# Altium PCB Naxida_Eyes_Up.PcbDoc
Units mil, origin at the board's own origin, x right, y up, seen from the top; angles counter-clockwise.
Board outline 2236.22 x 1401.57 mil, 2 copper layers (Top Layer, Bottom Layer); 45 components, 56 nets, 228 pads, 158 vias.
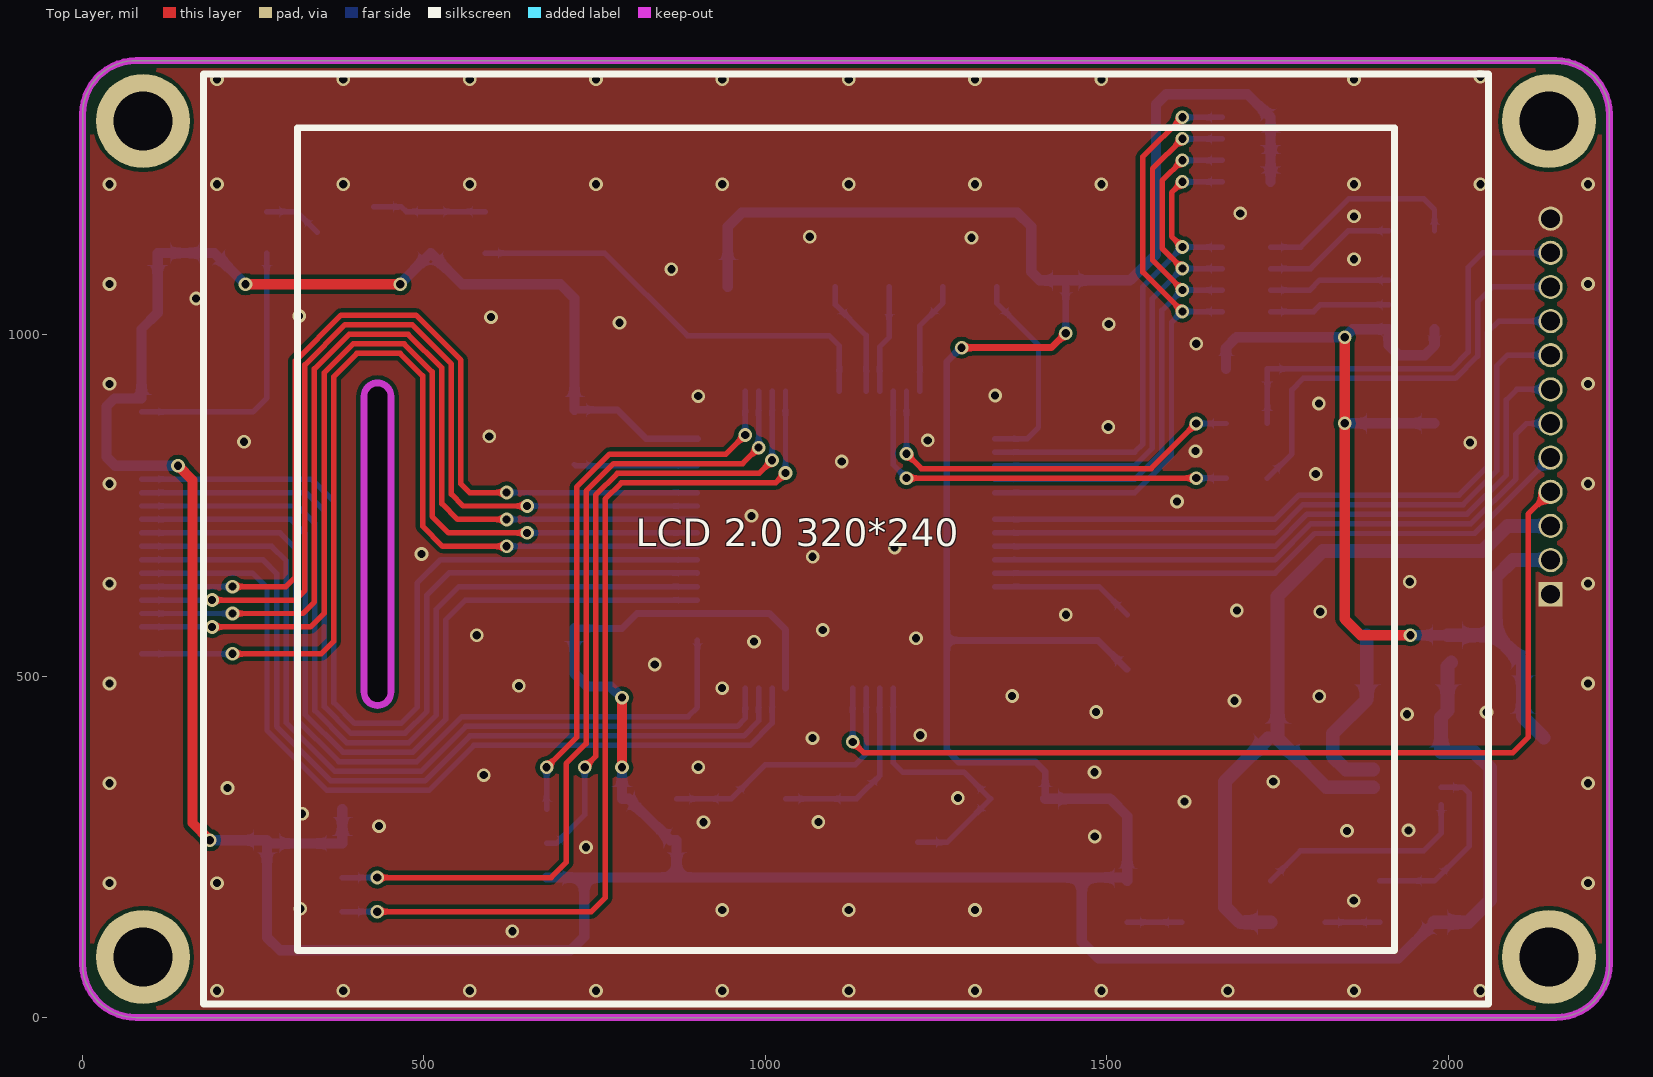
[diagram p0: Top Layer view]
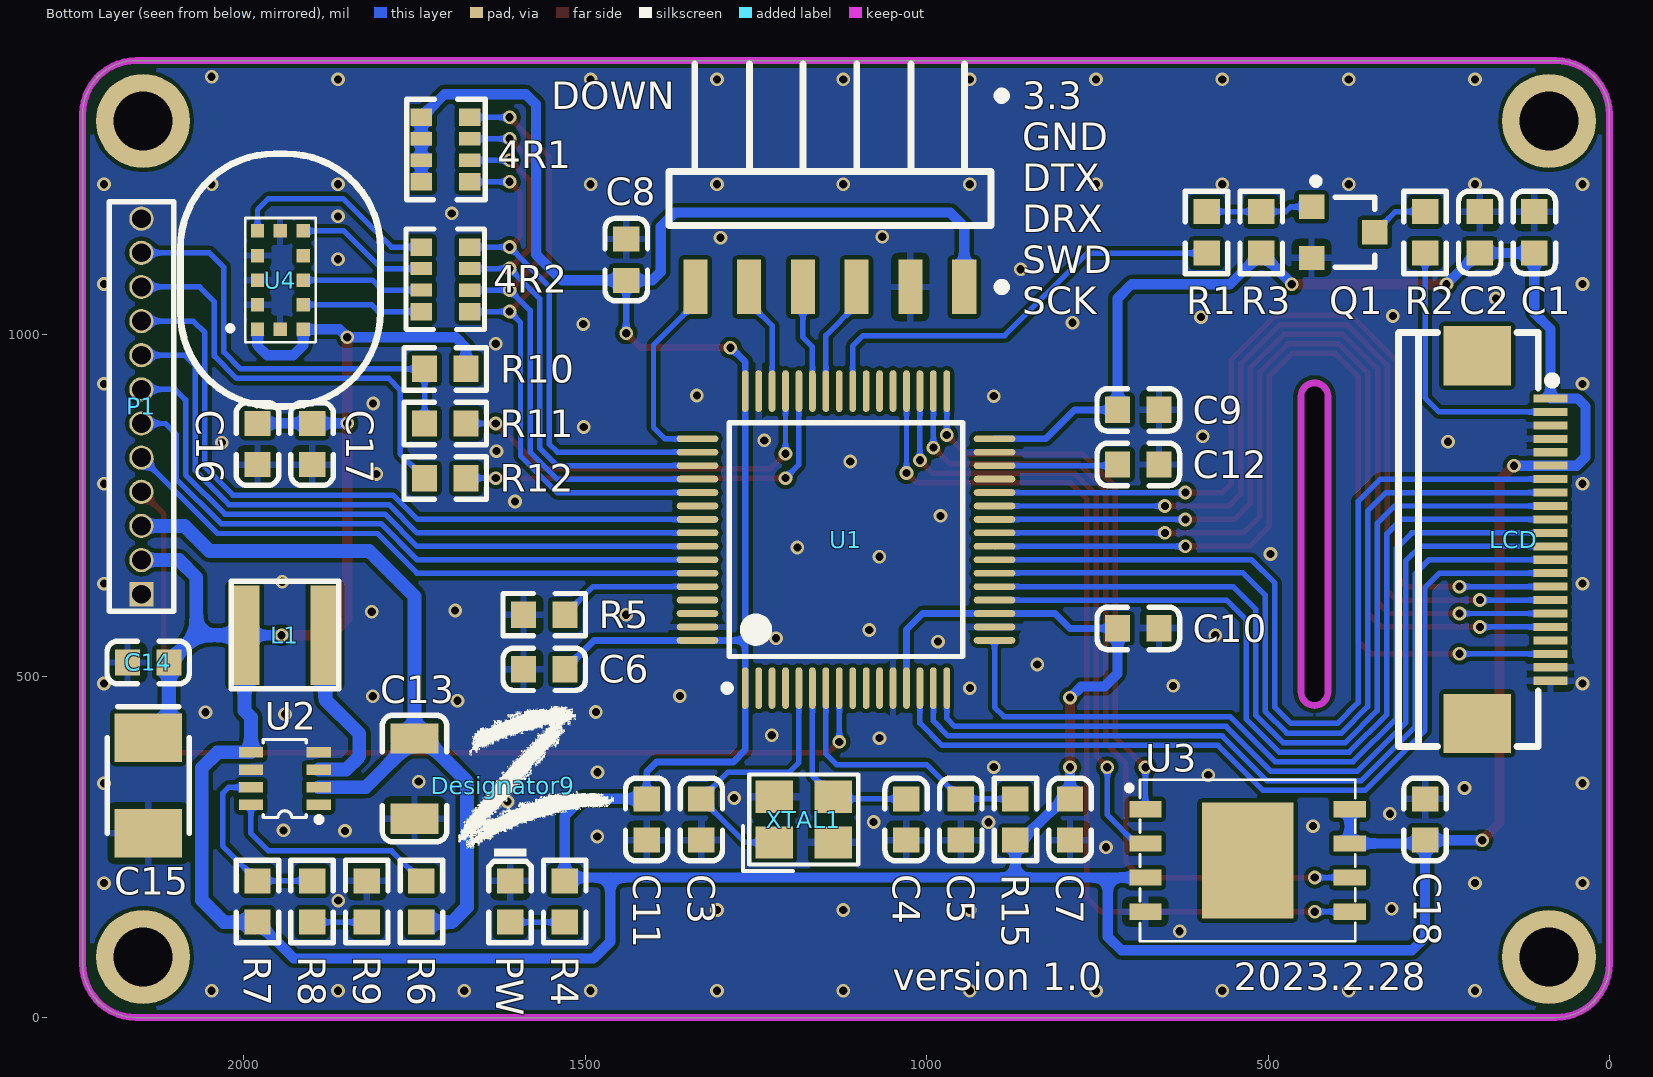
[diagram p1: Bottom Layer view, seen from below]
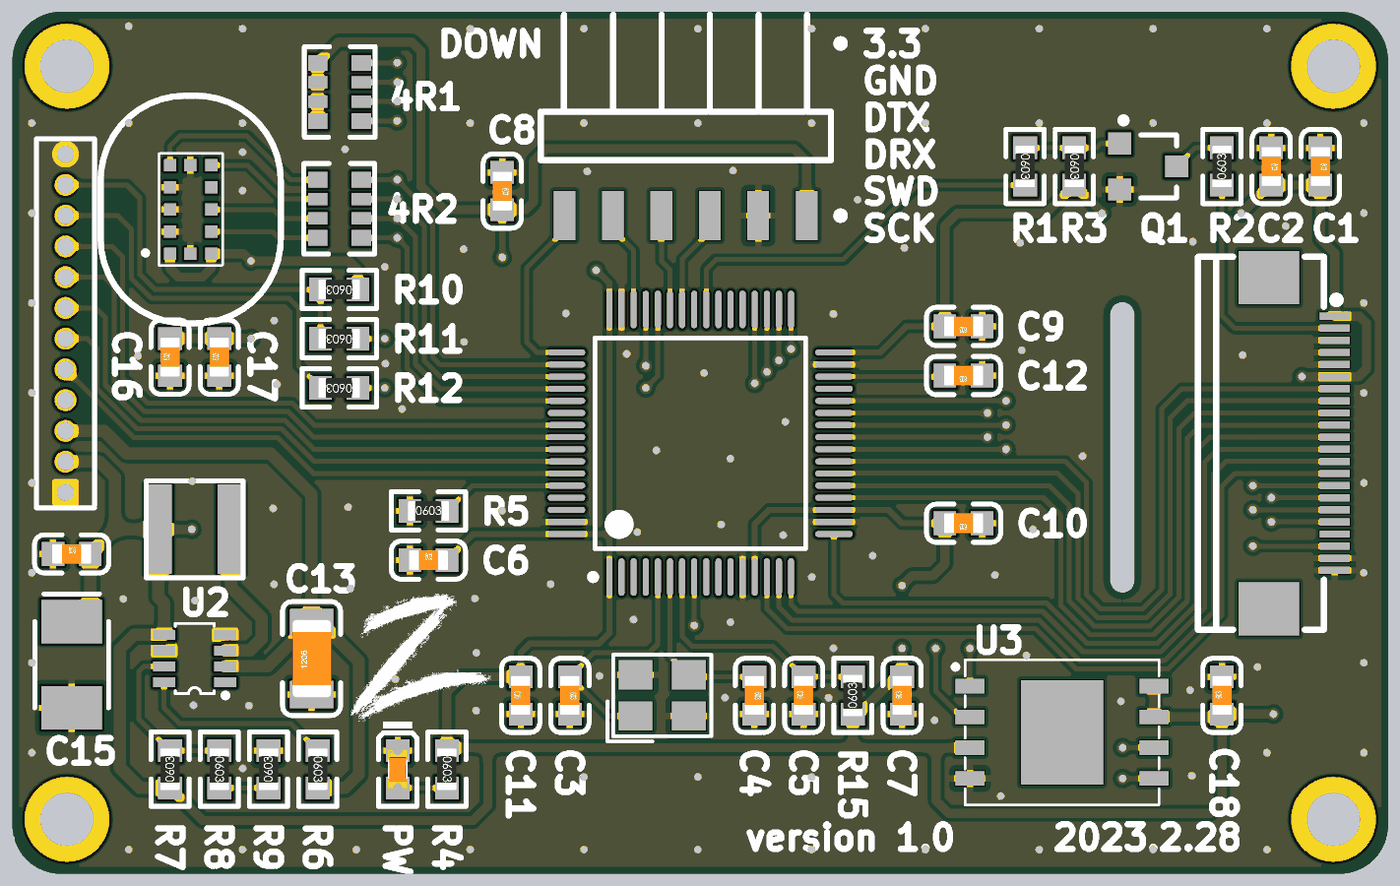
[diagram p2: 3D render of the assembled board from below, using the file's embedded part models]

## Layer stack, top to bottom
Top Solder: solder mask 0.4, Solder Resist, Dk 3.5
Top Layer: signal copper 1.4
Dielectric 1: dielectric 12.6, FR-4, Dk 4.8
Bottom Layer: signal copper 1.4
Bottom Solder: solder mask 0.4, Solder Resist, Dk 3.5

## Board outline
0,78.74 0,1322.83 cw(c78.74,1322.83) 78.74,1401.57 2157.48,1401.57 cw(c2157.48,1322.83) 2236.22,1322.83 2236.22,78.74 cw(c2157.48,78.74) 2157.48,0 78.74,0 cw(c78.74,78.74)
cut-out: 431.92,457.03 cw(c431.92,476.71) 412.23,476.71 412.23,909.79 cw(c431.92,909.79) 431.92,929.47 cw(c431.92,909.79) 451.6,909.79 451.6,476.71 cw(c431.92,476.71)

## Design rules (kind name [scope] priority, off if disabled: settings)
Clearance [All] p1: gap=6 ignorepadtopadclearanceinfootprint=TRUE except(5: Arc-Via Track-Via SMDPad-Via THPad-Via Via-Via)
PolygonConnect PolygonConnect_2 [HasPad('P1-1','P1-12','U2-4','U2-6')] p1: connectstyle=Direct reliefconductorwidth=10 reliefentries=4 polygonreliefangle="90 Angle" airgapwidth=10
PolygonConnect PolygonConnect_1 [IsVia] p2: connectstyle=Direct reliefconductorwidth=10 reliefentries=4 polygonreliefangle="90 Angle" airgapwidth=10
PolygonConnect [All] p3: connectstyle=Relief reliefconductorwidth=10 reliefentries=4 polygonreliefangle="90 Angle" airgapwidth=10
RoutingVias [All] p1: holewidth=12 width=20 viastyle="Through Hole" minholewidth=12 minwidth=20 maxholewidth=28 maxwidth=50
SolderMaskExpansion [All] p1: expansion=4 istentingtop=FALSE
Width [All] p1: maxlimit=30 minlimit=6 preferedwidth=10
30 further rules are at their usual default settings.

## Components (designator, comment, footprint, x,y, rotation, side; value= is the part's Value field where it differs from the comment)
4R1 "4.7K" R_4R 1704.56,1271.24 r270 bottom
4R2 "120R" R_4R 1704.57,1081.25 r90 bottom
C1 "0.1uF" LC-0603_C 110,1150 r270 bottom
C2 "0.1uF" LC-0603_C 190,1150 r270 bottom
C3 "Cap" LC-0603_C 1330,290 r270 bottom value=22pF
C4 "Cap" LC-0603_C 1030,290 r270 bottom value=22pF
C5 "0.1uF" LC-0603_C 950,290 r90 bottom
C6 "0.1uF" LC-0603_C 1560,510 r180 bottom
C7 "0.1uF" LC-0603_C 790,290 r90 bottom
C8 "0.1uF" LC-0603_C 1440,1110 r270 bottom
C9 "0.1uF" LC-0603_C 690,890 r0 bottom
C10 "0.1uF" LC-0603_C 690,570 r0 bottom
C11 "0.1uF" LC-0603_C 1410,290 r90 bottom
C12 "4.7uF" LC-0603_C 690,810 r0 bottom
C13 "4.7uF" LC-1206_C 1750,350 r90 bottom
C14 "0.1uF" LC-0603_C 2140,520 r180 bottom
C15 "47uF" CAP-3528 2140,340 r270 bottom
C16 "0.1uF" LC-0603_C 1980,840 r90 bottom
C17 "4.7uF" LC-0603_C 1900,840 r90 bottom
C18 "0.1uF" LC-0603_C 270,290 r90 bottom
Designator9 "Comment" Z_LOGO_MINI 1620,340 r180 bottom
DOWN "Header 6*1" COM_W_2.0_6P 1141.85,1070 r0 bottom
L1 "Inductor" Inductor-SWPA4030 1940,560 r0 bottom value=1uH
LCD "COM_22PIN" FPC_22PIN_0.5 140,700 r270 bottom locked
P1 "Header 12*1" HDR12X1_A-1.27mm 2150,620 r90 bottom
PW "LED0" LC-0603_LED_S1 1610,170 r270 bottom
Q1 "SS8050" SOT-23 390,1150 r270 bottom
R1 "1K" LC-0603_R 590,1150 r270 bottom
R2 "10R" LC-0603_R 270,1150 r90 bottom
R3 "10K" LC-0603_R 510,1150 r270 bottom
R4 "Res1" LC-0603_R 1530,170 r270 bottom value=4.7K
R5 "10K" LC-0603_R 1560,590 r180 bottom
R6 "10K" LC-0603_R 1740,170 r270 bottom
R7 "180K" LC-0603_R 1980,170 r90 bottom
R8 "20K" LC-0603_R 1900,170 r270 bottom
R9 "20K" LC-0603_R 1820,170 r90 bottom
R10 "1.5K" LC-0603_R 1705,950 r0 bottom
R11 "22R" LC-0603_R 1705,870 r0 bottom
R12 "22R" LC-0603_R 1705,790 r0 bottom
R15 "10K" LC-0603_R 870,290 r90 bottom
U1 "STM32F446RET6" LQFP64_L 1118.11,700 r90 bottom
U2 "MP2161" SOT-23-8_MP2161 1940,350 r90 bottom
U3 "W25Qxxx" WSON-8_W25Qxxx 530,230 r270 bottom
U4 "VL53L0X" VL53L0X 1980,1008 r270 bottom
XTAL1 "8M" XTAL_3225_4Pin 1180,290 r180 bottom

## Footprints (in the part's own frame and the unit in brackets; to place one, negate y for a bottom-side part, rotate by r counter-clockwise, add the part's x,y. Pads: shape width x height; smd on the part's side, far side on the other; paste and mask are expansions set on the pad)
CAP-3528 [mm] "钽电容"
  rect 1.8x2.5 smd: 1(-1.778,0) 2(1.778,0)
  silkscreen extent -2.92,-1.52 1.78,1.52, body extent -1.91,-1.4 1.91,1.4, height 1.1
COM_W_2.0_6P [mm]
  rect 0.899x2.029 smd mask+0.05: 1(-5,0) 2(-2.998,0) 3(-0.999,0) 4(1.002,0) 5(3.001,0) 6(5,0)
  silkscreen extent -6,-8.29 5.98,-2.29
FPC_22PIN_0.5 [mm]
  rect 0.3x1.25 smd mask+0.051: 1(-5.25,1.362) 2(-4.75,1.362) 3(-4.25,1.362) 4(-3.75,1.362) 5(-3.25,1.362) 6(-2.75,1.362) 7(-2.25,1.362) 8(-1.75,1.362) 9(-1.25,1.362) 10(-0.75,1.362) 11(-0.25,1.362) 12(0.25,1.362) 13(0.75,1.362) 14(1.25,1.362) 15(1.75,1.362) 16(2.25,1.362) 17(2.75,1.362) 18(3.25,1.362) 19(3.75,1.362) 20(4.25,1.362) 21(4.75,1.362) 22(5.25,1.362)
  rect 2.2x2.5 smd mask+0.051: 23(6.84,-1.361) 24(-6.84,-1.362)
  silkscreen extent -7.7,-4.29 7.7,1.58
HDR12X1_A-1.27mm [mm] "Connector; Header; 12 Position"
  rect 0.9x0.9 hole 0.7: 1(0,0)
  round 0.9 hole 0.7: 2(1.27,0) 3(2.54,0) 4(3.81,0) 5(5.08,0) 6(6.35,0) 7(7.62,0) 8(8.89,0) 9(10.16,0) 10(11.43,0) 11(12.7,0) 12(13.97,0)
  silkscreen extent -0.64,-1.2 14.6,1.2
Inductor-SWPA4030 [mm] "Inductor"
  rect 1.1x3.7 smd: 1(-1.5,0) 2(1.5,0)
  silkscreen extent -2,-2 2,2
LC-0603_C [mm]
  rect 0.93x0.98 smd: 1(-0.77,0) 2(0.77,0)
  silkscreen extent -1.53,-0.79 1.54,0.79, body extent -0.8,-0.4 0.8,0.4, height 0.3
LC-0603_LED_S1 [mm]
  rect 0.93x0.98 smd: 1(0.77,0) 2(-0.77,0)
  silkscreen extent -1.98,-0.79 1.54,0.79, body extent -0.8,-0.4 0.8,0.4, height 0.6
LC-0603_R [mm]
  rect 0.93x0.98 smd: 1(-0.77,0) 2(0.77,0)
  silkscreen extent -1.53,-0.79 1.54,0.79, body extent -0.85,-0.4 0.85,0.4, height 0.56
LC-1206_C [mm]
  rect 1.13x1.8 smd: 1(-1.49,0) 2(1.49,0)
  silkscreen extent -2.36,-1.2 2.35,1.2, body extent -1.6,-0.81 1.6,0.79, height 1
LQFP64_L [mm] "Thin QFP, 64-Leads, Body 10x10mm, Pitch 0.5mm, IPC High Density"
  oval 1.55x0.25 smd: 1(-5.525,3.75) 2(-5.525,3.25) 3(-5.525,2.75) 4(-5.525,2.25) 5(-5.525,1.75) 6(-5.525,1.25) 7(-5.525,0.75) 8(-5.525,0.25) 9(-5.525,-0.25) 10(-5.525,-0.75) 11(-5.525,-1.25) 12(-5.525,-1.75) 13(-5.525,-2.25) 14(-5.525,-2.75) 15(-5.525,-3.25) 16(-5.525,-3.75) 33(5.525,-3.75) 34(5.525,-3.25) 35(5.525,-2.75) 36(5.525,-2.25) 37(5.525,-1.75) 38(5.525,-1.25) 39(5.525,-0.75) 40(5.525,-0.25) 41(5.525,0.25) 42(5.525,0.75) 43(5.525,1.25) 44(5.525,1.75) 45(5.525,2.25) 46(5.525,2.75) 47(5.525,3.25) 48(5.525,3.75)
  oval 0.25x1.55 smd: 17(-3.75,-5.525) 18(-3.25,-5.525) 19(-2.75,-5.525) 20(-2.25,-5.525) 21(-1.75,-5.525) 22(-1.25,-5.525) 23(-0.75,-5.525) 24(-0.25,-5.525) 25(0.25,-5.525) 26(0.75,-5.525) 27(1.25,-5.525) 28(1.75,-5.525) 29(2.25,-5.525) 30(2.75,-5.525) 31(3.25,-5.525) 32(3.75,-5.525) 49(3.75,5.525) 50(3.25,5.525) 51(2.75,5.525) 52(2.25,5.525) 53(1.75,5.525) 54(1.25,5.525) 55(0.75,5.525) 56(0.25,5.525) 57(-0.25,5.525) 58(-0.75,5.525) 59(-1.25,5.525) 60(-1.75,5.525) 61(-2.25,5.525) 62(-2.75,5.525) 63(-3.25,5.525) 64(-3.75,5.525)
  silkscreen extent -5.65,-4.35 4.35,4.55, body extent -5,-5 5,5, height 1.6
R_4R [mm]
  rect 0.65x0.8 smd: 1(-1.2,-0.9) 4(1.2,-0.9) 5(1.2,0.9) 8(-1.2,0.9)
  rect 0.5x0.8 smd: 2(-0.4,-0.9) 3(0.4,-0.9) 6(0.4,0.9) 7(-0.4,0.9)
  silkscreen extent -1.87,-1.45 1.87,1.47
SOT-23 [mm]
  rect 0.9x0.95 smd: 1(-0.95,-1.175) 2(0.95,-1.175) 3(0,1.175)
  silkscreen extent -2.03,-1.14 1.3,1.18, body extent -1.7,-0.8 1.7,0.8, height 1.5
SOT-23-8_MP2161 [mm]
  rect 0.4x0.9 smd: 1(-0.975,-1.26) 2(-0.325,-1.26) 3(0.325,-1.26) 4(0.975,-1.26) 5(0.975,1.26) 6(0.325,1.26) 7(-0.325,1.26) 8(-0.975,1.26)
  silkscreen extent -1.62,-1.37 1.45,0.8
VL53L0X [mm]
  rect 0.5x0.5 smd: 1(0,0) 2(-0.914,0) 3(-1.829,0) 4(-2.743,0) 5(-3.658,0) 6(-3.658,0.838) 7(-3.658,1.702) 8(-2.743,1.702) 9(-1.829,1.702) 10(-0.914,1.702) 11(0,1.702) 12(0,0.838)
  silkscreen extent -4.14,-1.08 0.49,2.17
WSON-8_W25Qxxx [mil]
  rect 23.6x47.2 smd mask+2: 1(-75,-149.6) 2(-25,-149.6) 3(25,-149.6) 4(75,-149.6) 5(75,149.6) 6(25,149.6) 7(-25,149.6) 8(-75,149.6)
  rect 169.3x133.9 smd mask+2: 9(0,0)
  silkscreen extent -118,-177 118,158
XTAL_3225_4Pin [mm]
  rect 1.4x1.2 smd mask+0.051: 1(-1.1,-0.85) 2(1.1,-0.85) 3(1.1,0.85) 4(-1.1,0.85)
  silkscreen extent -2.26,-1.91 2.03,1.68
Z_LOGO_MINI [mil]
  silkscreen extent -66,-92 162,115

## Part data
4R1 4R2: library part 4R
C1 C2 C5 C6 C7 C8 C9 C10 C11 C12 C13 C14 C16 C17 C18: library part Cap, "无极性电容", LatestRevisionDate=17-Jul-2002, LatestRevisionNote="Re-released for DXP Platform.", PackageReference=RAD-0.3, Published=8-Jun-2000, Publisher="Altium Limited"
C3 C4: "无极性电容", LatestRevisionDate=17-Jul-2002, LatestRevisionNote="Re-released for DXP Platform.", PackageReference=RAD-0.3, Published=8-Jun-2000, Publisher="Altium Limited"
C15: library part "Cap Pol", "极性电解电容", LatestRevisionDate=17-Jul-2002, LatestRevisionNote="Re-released for DXP Platform.", PackageReference=RB7.6-15, Published=8-Jun-2000, Publisher="Altium Limited", Vol=16V
DOWN P1: "接插件", LatestRevisionDate=17-Jul-2002, LatestRevisionNote="Re-released for DXP Platform.", Publisher="Altium Limited"
L1: "电感", Code_IEC=1005, Code_JEITA=0402, LatestRevisionDate=17-Jul-2002, LatestRevisionNote="Re-released for DXP Platform.", PackageReference=0402-A, Published=8-Jun-2000, Publisher="Altium Limited"
PW: "发光二极管", LatestRevisionDate=08-Jul-2005, LatestRevisionNote="Mech Layer 1 removed.", PackageReference=LED-0, Published=8-Jun-2000, Publisher="Altium Limited"
Q1: "NPN贴片三极管", PackageDocument=Sep-1998, Code_JEDEC=TO-92A, ComponentLink1Description="Manufacturer Link", ComponentLink1URL=http://www.fairchildsemi.com/, ComponentLink2Description=Datasheet, ComponentLink2URL=http://www.fairchildsemi.com/ds/2N%2F2N3904.pdf, DatasheetDocument=1997, LatestRevisionDate=15-Jan-2003, LatestRevisionNote="PCB Footprint 'BCY-W3/D4.7' replaced", PackageReference=TO-92A, Published=8-Jun-2000, Publisher="Altium Limited"
R1 R2 R3 R5 R6 R7 R8 R9 R10 R11 R12 R15: library part Res1, "贴片电阻", LatestRevisionDate=17-Jul-2002, LatestRevisionNote="Re-released for DXP Platform.", PackageReference=AXIAL-0.4, Published=8-Jun-2000, Publisher="Altium Limited"
R4: "贴片电阻", LatestRevisionDate=17-Jul-2002, LatestRevisionNote="Re-released for DXP Platform.", PackageReference=AXIAL-0.4, Published=8-Jun-2000, Publisher="Altium Limited"
U1: library part Y-STM32F446RET6
XTAL1: library part XTAL_5032

## Free pads (board coordinates)
  round 137.8 hole 86.61: 2(88.58,88.58) 2(88.58,1312.99) 2(2147.64,88.58) 2(2147.64,1312.99)

## Via types
v1: diameter 20, hole 12, Top Layer to Bottom Layer, tented both sides, 158 vias

## Nets (pads, with @x,y where several pads share a name; then routed paths per layer and width w, separated by ;. In a path a pad name is that pad's centre, name@x,y a point inside that pad or via, vN(x,y) a via of type N, cw(c..) or ccw(c..) an arc to the next point about the centre after c; other vN are vias at no path point)
3.3V: 4R1.1 4R1.2 4R1.3 4R1.4 C1.2 C2.2 C6.2 C7.2 C8.2 C9.2 C10.2 C11.2 C14.2 C15.1 C16.2 C17.2 C18.1 DOWN.1 L1.2 LCD.1 LCD.6 P1.2 R3.2 R4.1 R7.1 R10.1 R15.1 U1.1 U1.13 U1.19 U1.32 U1.48 U1.64 U2.5 U3.3 U3.7 U3.8 U4.1 U4.11 | length 10299.5
  Top Layer w10: v1(1287.42,981.1) 1419.16,981.1 v1@1440.07,1002.01
  Top Layer w15: v1(139.88,808.27) 161.1,787.06 161.1,284.94 v1(186.35,259.68) ; v1(238.6,1073.93) v1(465.29,1073.93) ; v1(790,366.44) v1(790,468.56) ; v1(1848.49,996.33) v1(1848.49,870.32) 1848.49,583.56 1872.05,560 v1(1944.71,560)
  Bottom Layer w10: C10.2 790.14,570 811.87,591.73 U1.19 1006.19,591.73 1029.53,568.4 U1.13 ; C9.2 783.36,890 825.72,847.64 U1.32 ; v1(1287.42,981.1) 1286.32,981.1 1265.75,960.52 U1.48 1265.75,552.36 ; C11.2 1410,359.9 1395.42,374.48 1282.91,374.48 1265.75,391.64 U1.1 1265.75,552.36 ; v1(1440,1002.22) C8.2 ; C6.2 1487.32,552.36 U1.64 1265.75,552.36
  Bottom Layer w15: v1(139.88,808.27) LCD.6 48,808.27 34.95,821.33 34.95,894.95 46.68,906.69 LCD.1 86.38,1008.5 110,1032.12 C1.2 C2.2 192.85,1119.68 v1(238.6,1073.93) ; v1(186.35,259.68) C18.1 ; U3.8 U3.7 274.69,255 C18.1 ; v1(465.29,1073.93) 465.29,1074.98 R3.2 555.75,1073.93 699.9,1073.93 720.32,1053.52 C9.2 ; U3.3 734.65,205 ; C10.2 720.32,504.06 739.65,484.73 773.83,484.73 v1(790,468.56) v1@790.14,468.69 ; v1(790,366.44) C7.2 799.88,320.31 860.51,259.69 R15.1 870,205 ; DOWN.1 945,1158.45 965.44,1178.88 1369.02,1178.88 1389.29,1158.62 1389.29,1092.25 1401.86,1079.68 C8.2 1534.17,1079.68 1572.28,1117.8 1572.28,1337.45 1587.17,1352.33 1706.14,1352.33 4R1.1 4R1.4 ; C11.2 1504.85,320.31 1530,295.17 R4.1 1525.31,205 1463.52,205 ; R10.1 1674.69,981.08 1689.93,996.33 v1(1848.49,996.33) 1860.16,1008 U4.11 1913,984.42 1927.42,970 1965.82,970 1980,984.18 U4.1 ; v1(1848.49,870.32) C17.2 C16.2 ; v1(1944.71,560) L1.2 ; R7.1 1926.88,86.56 1487.81,86.56 1463.52,110.86 1463.52,205 ; C18.1 270,117.52 289.08,98.44 714.69,98.44 734.65,118.39 734.65,205 ; 734.65,205 870,205 ; 870,205 1463.52,205
  Bottom Layer w20: R7.1 2029.19,139.69 2061.71,172.2 2061.71,365.47 2038.79,388.39 U2.5 1989.6,439.87 1999.06,449.32 1999.06,514.53 L1.2@2004.53,520 ; L1.2 2069.69,560 ; C15.1 2109.68,440.31 C14.2 2069.69,560 ; P1.2 2094.98,670 2069.69,644.71 2069.69,560
BAT_ADC: P1.4 U1.8 | length 1457.2
  Top Layer w8: v1(1127.95,403.74) 1143.77,387.92 2094.94,387.92 2117.25,410.23 2117.25,737.25 P1.4
  Bottom Layer w8: v1(1127.95,403.74) U1.8
BAT_IN: C13.2 P1.3 R6.2 U2.2 | length 1183.7
  Bottom Layer w8: C13.2@1736.21,408.66 C13.2
  Bottom Layer w20: C13.2@1736.21,408.66 1673.1,345.54 1673.1,161.91 1695.32,139.68 R6.2 ; U2.2 1821.45,337.21 C13.2 1750,616.93 1816.39,683.32 2050.31,683.32 2086.99,720 P1.3
BLK: R1.2 U1.40 | length 640.5
  Bottom Layer w8: R1.2 764.72,1119.68 885.86,998.55 1092.9,998.55 1108.27,983.18 U1.40
CHRG_GPIO: P1.9 U1.55 | length 1049.9
  Bottom Layer w8: U1.55 1746,729.53 1781.74,765.27 2016.08,765.27 2057.16,806.36 2057.16,1003.01 2074.16,1020 P1.9
CS: LCD.18 U1.25 | length 1430.9
  Top Layer w8: v1(189.7,572.05) 333.6,572.05 353.64,592.09 353.64,944.23 396.09,986.67 470.97,986.67 512.11,945.54 512.11,733.89 536.16,709.84 v1(651.05,709.84)
  Bottom Layer w8: LCD.18 v1(189.7,572.05) ; v1(651.05,709.84) U1.25
DB0: LCD.14 U1.14 | length 1269.9
  Bottom Layer w8: LCD.14 248.82,650.79 270.1,629.51 270.1,420.47 357.88,332.69 507.1,332.69 572.96,398.55 977.35,398.55 1009.84,431.04 U1.14
DB1: LCD.13 U1.15 | length 1253.6
  Bottom Layer w8: LCD.13 263.98,670.47 284.1,650.35 284.1,426.26 363.68,346.69 501.3,346.69 567.16,412.55 968.4,412.55 990.16,434.31 U1.15
DB2: LCD.12 U1.16 | length 1235.9
  Bottom Layer w8: LCD.12 277.08,690.16 298.1,669.13 298.1,432.06 369.48,360.69 495.5,360.69 561.36,426.55 959.04,426.55 970.47,437.98 U1.16
DB3: LCD.11 U1.17 | length 1230.1
  Bottom Layer w8: LCD.11 289.37,709.84 312.1,687.11 312.1,437.86 375.27,374.69 489.7,374.69 555.56,440.55 886.86,440.55 900.59,454.28 U1.17
DB4: LCD.10 U1.20 | length 1288.4
  Bottom Layer w8: LCD.10 305.13,729.53 326.1,708.56 326.1,443.66 381.07,388.69 483.9,388.69 532.17,436.96 532.17,582.97 560.62,611.42 U1.20
DB5: LCD.9 U1.21 | length 1304.2
  Bottom Layer w8: LCD.9 314.77,749.21 340.1,723.88 340.1,449.46 386.87,402.69 478.1,402.69 518.17,442.76 518.17,598.28 550.99,631.1 U1.21
DB6: LCD.8 U1.22 | length 1325
  Bottom Layer w8: LCD.8 327.05,768.9 354.1,741.85 354.1,455.26 392.67,416.69 472.3,416.69 504.17,448.56 504.17,618.54 536.96,651.34 900.04,651.34 U1.22
DB7: LCD.7 U1.23 | length 1341.1
  Bottom Layer w8: LCD.7 335.65,788.58 368.1,756.13 368.1,461.06 398.47,430.69 466.5,430.69 490.17,454.35 490.17,636.1 524.54,670.47 U1.23
DC: LCD.17 U1.26 | length 1412.3
  Top Layer w8: v1(219.7,591.73) 322.8,591.73 339.64,608.58 339.64,950.03 390.29,1000.67 476.77,1000.67 526.11,951.34 526.11,752.63 549.21,729.53 v1(621.05,729.53)
  Bottom Layer w8: LCD.17 v1(219.7,591.73) ; v1(621.05,729.53) U1.26
GND: C1.1 C2.1 C3.2 C4.2 C5.1 C6.1 C7.1 C8.1 C9.1 C10.1 C11.1 C12.1 C13.1 C14.1 C15.2 C16.1 C17.1 C18.2 DOWN.2 LCD.3 LCD.4 LCD.5 LCD.21 LCD.22 P1.1 P1.12 PW.2 Q1.2 R5.1 R9.2 U1.12 U1.18 U1.31 U1.47 U1.63 U2.4 U2.6 U3.4 U4.2 U4.3 U4.4 U4.6 U4.12 XTAL1.2 XTAL1.4
  other v1: 196.85,39.37 381.89,39.37 566.93,39.37 751.97,39.37 937.01,39.37 1122.05,39.37 1307.09,39.37 1492.13,39.37 1677.16,39.37 1862.2,39.37 2047.24,39.37 629.5,126.25 937.01,157.48 1122.05,157.48 1307.09,157.48 318.98,159.41 1861.84,171.26 39.37,196.85 196.85,196.85 2204.72,196.85 737.28,249.53 1482.46,265.25 1851.84,273.42 1941.85,274.13 434.12,280.4 909.49,286.1 1077.67,286.3 321.6,298.43 1613.86,316.3 1281.96,321.59 212.3,336.29 39.37,343.08 2204.72,343.08 1743.96,345.57 587.7,355.02 1482.08,359.18 901.62,366.81 1069.08,409.21 1226.73,413.46 1939.71,444.16 2056.15,447.02 1484.4,447.5 1687.02,463.85 1361.41,470.96 1811.11,470.59 936.71,482.52 639.04,485.75 39.37,489.31 2204.72,489.31 837.95,517.03 983.33,550.57 1220.64,555.56 577.33,560.01 1084.14,567.64 1440.2,590.06 1812.54,594.18 1690.57,596.08 39.37,635.55 2204.72,635.55 1943.86,638.15 1069.21,674.99 496.51,678.96 1189.36,688.5 979.64,734.71 1602.9,755.7 39.37,781.78 2204.72,781.78 1806.18,795.97 1111.87,814.34 1630.09,829.59 2032.19,842.08 236.46,843.38 1237.77,845.27 595.49,851.2 1502.18,864.82 1810.72,899.23 901.61,910.15 1336.45,911.05 39.37,928.01 2204.72,928.01 1631.04,986.74 1502.89,1015.53 786.34,1017.52 598.08,1025.81 317.14,1027.54 166.32,1053.16 39.37,1074.24 2204.72,1074.24 862.34,1095.87 1862.2,1110.67 1301.88,1141.97 1064.92,1143.43 1862.2,1173.36 1695.46,1177.77 39.37,1220.47 196.85,1220.47 381.89,1220.47 566.93,1220.47 751.97,1220.47 937.01,1220.47 1122.05,1220.47 1307.09,1220.47 1492.13,1220.47 1862.2,1220.47 2047.24,1220.47 2204.72,1220.47 196.85,1373.95 381.89,1373.95 566.93,1373.95 751.97,1373.95 937.01,1373.95 1122.05,1373.95 1307.09,1373.95 1492.13,1373.95 1862.2,1373.95 2047.24,1377.95
IIC_SCL: P1.6 U1.58 | length 935.4
  Bottom Layer w8: U1.58 1746.34,670.47 1799.14,723.27 2033.48,723.27 2099.16,788.96 2099.16,854.56 2114.61,870 P1.6
IIC_SDA: P1.5 U1.59 | length 884.5
  Bottom Layer w8: U1.59 1746.45,650.79 1804.61,708.95 2038.95,708.95 P1.5
KEY_GPIO: P1.7 U1.57 | length 974
  Bottom Layer w8: U1.57 1746.22,690.16 1793.34,737.27 2027.68,737.27 2085.16,794.76 2085.16,904.69 2100.48,920 P1.7
LED_GPIO: P1.8 U1.56 | length 1012
  Bottom Layer w8: U1.56 1746.11,709.84 1787.54,751.27 2021.88,751.27 2071.16,800.56 2071.16,954.02 2087.14,970 P1.8
LEDK: LCD.2 R2.1 | length 404.4
  Bottom Layer w8: LCD.2 249.64,887.01 270,907.37 R2.1
Net4R2_5: 4R2.8 U4.10 | length 177.1
  Bottom Layer w8: 4R2.8 1802.85,1034.01 1812.84,1044 U4.10
Net4R2_6: 4R2.7 U4.9 | length 179
  Bottom Layer w8: 4R2.7 1797.44,1065.5 1811.94,1080 U4.9
Net4R2_7: 4R2.6 U4.7 | length 195.8
  Bottom Layer w8: 4R2.6 1798.6,1097 1853.6,1152 U4.7
Net4R2_8: 4R2.5 U4.5 | length 307.5
  Bottom Layer w8: 4R2.5 1783.95,1128.49 1854.93,1199.47 1964,1199.47 1980,1183.47 U4.5
NetC3_1: C3.1 U1.5 XTAL1.1 | length 407.2
  Bottom Layer w8: U1.5 1187.01,373.36 1200.88,359.48 1290.84,359.48 C3.1 1266.22,256.53 XTAL1.1
NetC4_1: C4.1 U1.6 XTAL1.3 | length 279.7
  Bottom Layer w8: C4.1 1133.54,320.31 XTAL1.3 1167.32,354.1 U1.6
NetC5_2: C5.2 R15.2 U1.7 | length 401.2
  Bottom Layer w8: R15.2 C5.2 999.74,370.05 1131.42,370.05 1147.64,386.27 U1.7
NetC12_2: C12.2 U1.30 | length 181
  Bottom Layer w8: C12.2 722.05,808.27 U1.30
NetL1_1: L1.1 U2.3 | length 265.9
  Bottom Layer w20: L1.1 1880.94,465.91 1830.78,415.75 1830.78,382.46 1850.04,363.21 U2.3@1890.39,363.21
NetPW_1: PW.1 R4.2 | length 80
  Bottom Layer w8: R4.2 PW.1
NetQ1_1: Q1.1 R1.1 R3.1 | length 166.7
  Bottom Layer w8: Q1.1@426.26,1187.4 Q1.1 467.1,1187.4 474.19,1180.31 R3.1 R1.1
NetQ1_3: Q1.3 R2.2 | length 86.3
  Bottom Layer w8: R2.2 313.43,1180.32 Q1.3
NetR5_2: R5.2 U1.60 | length 211.1
  Bottom Layer w8: U1.60 1488.58,631.1 R5.2
NetR6_1: R6.1 U2.8 | length 320.3
  Bottom Layer w8: R6.1 1783.68,244 1964,244 1989.61,269.61 U2.8
NetR7_2: R7.2 R8.1 U2.7 | length 274.4
  Bottom Layer w8: R8.1 R7.2 2031.11,251.42 2031.11,328.32 2022.22,337.21 U2.7
NetR8_2: R8.2 R9.1 | length 80
  Bottom Layer w8: R9.1 R8.2
RD: LCD.15 U1.28 | length 1378.2
  Top Layer w8: v1(219.7,631.1) 297.85,631.1 311.64,644.9 311.64,961.62 378.69,1028.67 488.37,1028.67 506.67,1010.37 554.11,962.93 554.11,781.65 566.86,768.9 v1(621.05,768.9)
  Bottom Layer w8: LCD.15 v1(219.7,631.1) ; v1(621.05,768.9) U1.28
RES: LCD.20 U1.24 | length 1470
  Top Layer w8: v1(219.7,532.68) 349.36,532.68 367.64,550.96 367.64,938.43 401.89,972.67 465.17,972.67 498.11,939.74 498.11,719.55 527.5,690.16 v1(621.05,690.16)
  Bottom Layer w8: LCD.20 v1(219.7,532.68) ; v1(621.05,690.16) U1.24 U1.24@900.21,689.78
RX: DOWN.4 U1.43 | length 158.3
  Bottom Layer w8: U1.43 1167.32,982.16 1181.3,996.14 DOWN.4
SCK: DOWN.6 U1.49 | length 302.4
  Bottom Layer w8: U1.49 1383.4,847.64 1400.02,864.26 1400.02,984.96 1338.7,1046.28 DOWN.6
SPI2_CS: U1.33 U3.1 | length 832.9
  Top Layer w8: v1(679.6,366.44) 723.48,410.32 723.48,776.8 771.78,825.09 942.28,825.09 v1(970.47,853.28)
  Bottom Layer w8: U3.1 v1(679.6,366.44) ; v1(970.47,853.28) U1.33
SPI2_MISO: U1.35 U3.2 | length 929.2
  Top Layer w8: v1(735.48,366.44) 751.48,382.44 751.48,765.2 783.37,797.09 990.87,797.09 v1(1009.84,816.07)
  Bottom Layer w8: U3.2 693.79,255 735.48,296.69 v1(735.48,366.44) ; v1(1009.84,816.07) U1.35
SPI2_MOSI: U1.36 U3.5 | length 1377.4
  Top Layer w8: v1(431.47,155) 745.05,155 765.48,175.44 765.48,759.4 789.17,783.09 1015.16,783.09 v1(1029.53,797.46)
  Bottom Layer w8: U3.5 v1(431.47,155) ; v1(1029.53,797.46) U1.36
SPI2_SCK: U1.34 U3.6 | length 1254.9
  Top Layer w8: v1(431.47,205) 686.14,205 708.2,227.06 708.2,371.84 737.48,401.12 737.48,771 777.57,811.09 966.58,811.09 v1(990.16,834.67)
  Bottom Layer w8: U3.6 v1(431.47,205) ; v1(990.16,834.67) U1.34
SWD: DOWN.5 U1.46 | length 166.4
  Bottom Layer w8: U1.46 1226.38,1013.21 1260,1046.84 DOWN.5
TX: DOWN.3 U1.42 | length 171.2
  Bottom Layer w8: DOWN.3 1102.5,1044.08 1147.64,998.94 U1.42
USB_D+: P1.11 R10.2 R11.2 | length 637.9
  Bottom Layer w8: R11.2 R10.2 2004.65,950 2029.16,974.51 2029.16,1098.82 2050.34,1120 P1.11
USB_D-: P1.10 R12.2 | length 632.1
  Bottom Layer w8: R12.2 1770.95,825.63 1770.95,919.25 1787.7,936 2010.45,936 2043.16,968.71 2043.16,1048.27 2064.89,1070 P1.10
USB_FS_DM: R12.1 U1.44 | length 603.7
  Top Layer w8: v1(1206.69,790) v1(1631.02,790)
  Bottom Layer w8: U1.44 1187.01,809.68 v1(1206.69,790) ; v1(1631.02,790) R12.1
USB_FS_DP: R11.1 U1.45 | length 596.1
  Top Layer w8: v1(1206.69,825.79) 1228.49,804 1565.02,804 v1(1631.02,870)
  Bottom Layer w8: v1(1206.69,825.79) U1.45 ; v1(1631.02,870) R11.1
VL_INT: 4R1.6 4R2.3 U1.51 | length 822.9
  Top Layer w8: v1(1610.71,1097) 1581.03,1126.69 1581.03,1225.8 v1(1610.71,1255.49)
  Bottom Layer w8: U1.51 1541.05,808.27 1566.83,834.05 1566.83,1053.12 v1(1610.71,1097) 4R2.3 ; v1(1610.71,1255.49) 4R1.6
VL_SCL: 4R1.8 4R2.1 U1.53 | length 948.6
  Top Layer w8: v1(1610.71,1034.01) 1553.03,1091.7 1553.03,1260.79 v1(1610.71,1318.48)
  Bottom Layer w8: U1.53 1541.28,768.9 1594.83,822.45 1594.83,1018.13 v1(1610.71,1034.01) 4R2.1 ; v1(1610.71,1318.48) 4R1.8
VL_SDA: 4R1.7 4R2.2 U1.52 | length 885.8
  Top Layer w8: v1(1610.71,1065.5) 1567.03,1109.19 1567.03,1243.3 v1(1610.71,1286.99)
  Bottom Layer w8: U1.52 1541.17,788.58 1580.83,828.25 1580.83,1035.62 v1(1610.71,1065.5) 4R2.2 ; v1(1610.71,1286.99) 4R1.7
VL_XSH: 4R1.5 4R2.4 U1.50 | length 760.1
  Top Layer w8: v1(1610.71,1128.49) 1595.03,1144.18 1595.03,1208.31 v1(1610.71,1224)
  Bottom Layer w8: U1.50 1540.94,827.95 1552.83,839.85 1552.83,1070.61 v1(1610.71,1128.49) 4R2.4 ; v1(1610.71,1224) 4R1.5
WR: LCD.16 U1.27 | length 1396.3
  Top Layer w8: v1(189.7,611.42) 311.58,611.42 325.64,625.48 325.64,955.83 384.49,1014.67 482.57,1014.67 540.11,957.13 540.11,766.58 557.47,749.21 v1(651.05,749.21)
  Bottom Layer w8: LCD.16 v1(189.7,611.42) ; v1(651.05,749.21) U1.27
pads on no net: LCD.19 LCD.23 LCD.24 U1.2 U1.3 U1.4 U1.9 U1.10 U1.11 U1.29 U1.37 U1.38 U1.39 U1.41 U1.54 U1.61 U1.62 U2.1 U3.9 U4.8

## Polygon pours and split planes (outlines as drawn)
GND on Top Layer "Top Layer-No Net" (solid, remove dead copper, pour order 12): 0,0 2236.22,0 2236.22,1401.57 0,1401.57
GND on Bottom Layer "Top Layer-No Net" (solid, remove dead copper, pour order 10): 0,0 2236.22,0 2236.22,1401.57 0,1401.57

## Keep-outs
Keep-Out Layer:
  lines w10: 0,78.74 ccw(c78.74,78.74) 78.74,0 2157.48,0 ccw(c2157.48,78.74) 2236.22,78.74 2236.22,1322.83 ccw(c2157.48,1322.83) 2157.48,1401.57 78.74,1401.57 ccw(c78.74,1322.83) 0,1322.83 0,78.74 ; 412.23,476.71 ccw(c431.92,476.71) 431.92,457.03 ccw(c431.92,476.71) 451.6,476.71 451.6,909.79 ccw(c431.92,909.79) 431.92,929.47 ccw(c431.92,909.79) 412.23,909.79 412.23,476.71

## Silkscreen, mask and mechanical layers (free items; w line width, h text height)
Top Overlay:
  lines w10: 177.17,19.68 2059.06,19.68 2059.06,1381.89 177.17,1381.89 177.17,19.68 ; 314.96,98.43 1921.26,98.43 1921.26,1303.15 314.96,1303.15 314.96,98.43
  text "LCD 2.0 320*240" at 810,690 h40
Bottom Overlay:
  circle w12: c890,1070 r5.91
  circle w12: c890,1350 r5.91
  lines w10: 1800,1032.58 ccw(c1937.58,1032.58) 1937.58,895 1955.2,895 ccw(c1955.2,1032.8) 2093,1032.8 2093,1127.2 ccw(c1955.2,1127.2) 1955.2,1265 1937.8,1265 ccw(c1937.8,1127.2) 1800,1127.2 1800,1032.58
  text "3.3" at 860,1330 h40
  text "GND" at 860,1270 h40
  text "DTX" at 860,1210 h40
  text "DRX" at 860,1150 h40
  text "SWD" at 860,1090 h40
  text "SCK" at 860,1030 h40
  text "2023.2.28" at 550,40 h40
  text "version 1.0" at 1050,40 h40

## Dimensions
0,78.74 to 2236.22,78.74 on Mechanical 1
78.74,0 to 78.74,1401.57 on Mechanical 1